# Altium PCB tt.pcbdoc
Units mm, origin at the board's own origin, x right, y up, seen from the top; angles counter-clockwise.
Board outline 38.65 x 44.67 mm, 2 copper layers (Top Layer, Bottom Layer); 1 components, 29 nets, 29 pads, 0 vias.
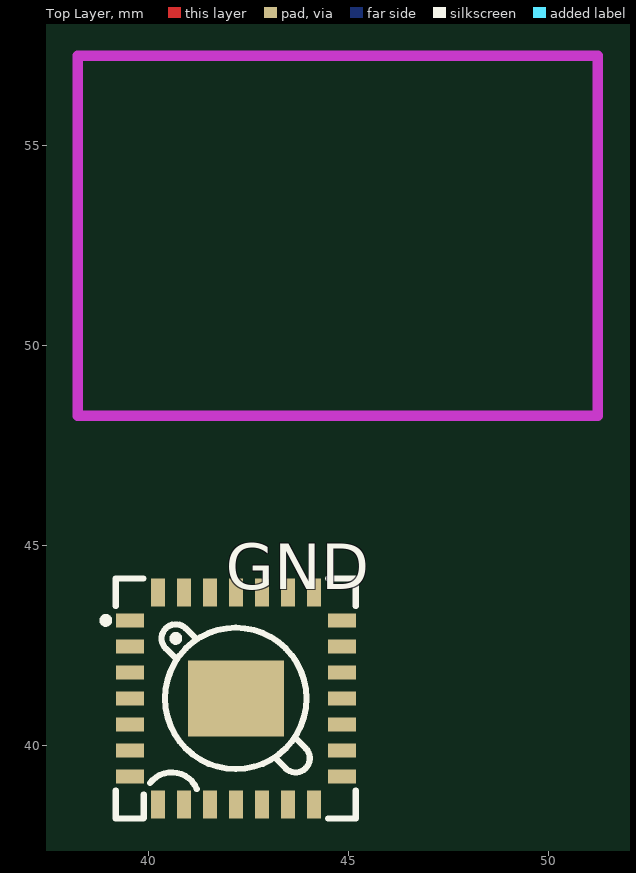
[diagram p0: Top Layer view]
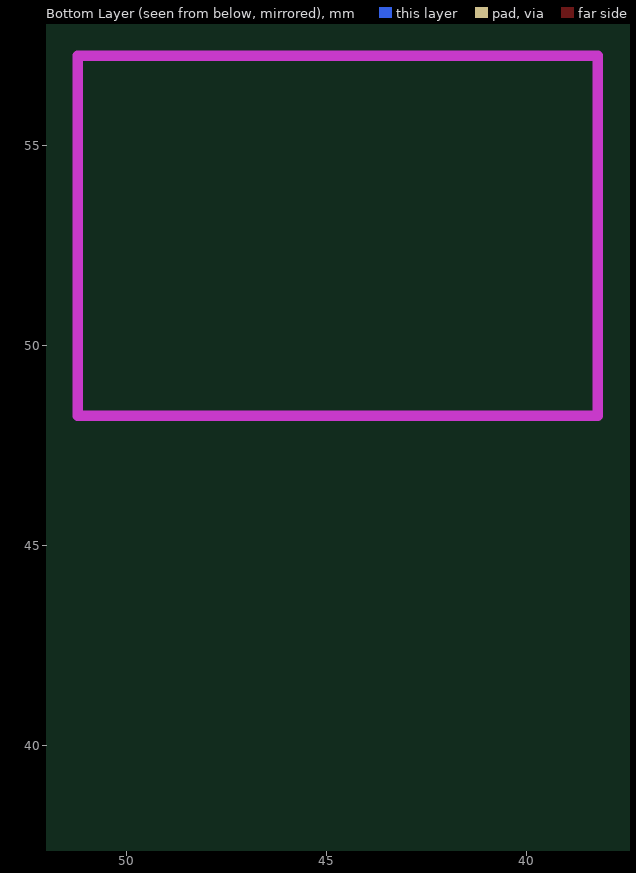
[diagram p1: Bottom Layer view, seen from below]

## Layer stack, top to bottom
Top Layer: signal copper (thickness not stored)
Dielectric: dielectric 0.32, FR-4, Dk 4.8
Bottom Layer: signal copper (thickness not stored)

## Board outline
64.054,25.4 25.4,25.4 25.4,70.069 64.054,70.069

## Components (designator, comment, footprint, x,y, rotation, side; value= is the part's Value field where it differs from the comment)
GND "PMW3901MB-TXQT" COB-28_L6.0-W6.0-P0.65-TL-EP 42.177,41.176 r0 top

## Footprints (in the part's own frame and the unit in brackets; to place one, negate y for a bottom-side part, rotate by r counter-clockwise, add the part's x,y. Pads: shape width x height; smd on the part's side, far side on the other; paste and mask are expansions set on the pad)
COB-28_L6.0-W6.0-P0.65-TL-EP [mm]
  rect 0.7x0.35 smd: 1(-2.65,1.95) 2(-2.65,1.3) 3(-2.65,0.65) 4(-2.65,0) 5(-2.65,-0.65) 6(-2.65,-1.3) 7(-2.65,-1.95) 15(2.65,-1.95) 16(2.65,-1.3) 17(2.65,-0.65) 18(2.65,0) 19(2.65,0.65) 20(2.65,1.3) 21(2.65,1.95)
  rect 0.35x0.7 smd: 8(-1.95,-2.65) 9(-1.3,-2.65) 10(-0.65,-2.65) 11(0,-2.65) 12(0.65,-2.65) 13(1.3,-2.65) 14(1.95,-2.65) 22(1.95,2.65) 23(1.3,2.65) 24(0.65,2.65) 25(0,2.65) 26(-0.65,2.65) 27(-1.3,2.65) 28(-1.95,2.65)
  rect 2.4x1.9 smd: 29(0,0)
  silkscreen extent -3.33,-3 3,3

## Nets (pads, with @x,y where several pads share a name; then routed paths per layer and width w, separated by ;. In a path a pad name is that pad's centre, name@x,y a point inside that pad or via, vN(x,y) a via of type N, cw(c..) or ccw(c..) an arc to the next point about the centre after c; other vN are vias at no path point)
GND_1: GND.1
GND_2: GND.2
GND_3: GND.3
GND_4: GND.4
GND_5: GND.5
GND_6: GND.6
GND_7: GND.7
GND_8: GND.8
GND_9: GND.9
GND_10: GND.10
GND_11: GND.11
GND_12: GND.12
GND_13: GND.13
GND_14: GND.14
GND_15: GND.15
GND_16: GND.16
GND_17: GND.17
GND_18: GND.18
GND_19: GND.19
GND_20: GND.20
GND_21: GND.21
GND_22: GND.22
GND_23: GND.23
GND_24: GND.24
GND_25: GND.25
GND_26: GND.26
GND_27: GND.27
GND_28: GND.28
GND_29: GND.29